# EAGLE board l3lfinal_v2 (EAGLE 6.5.0)
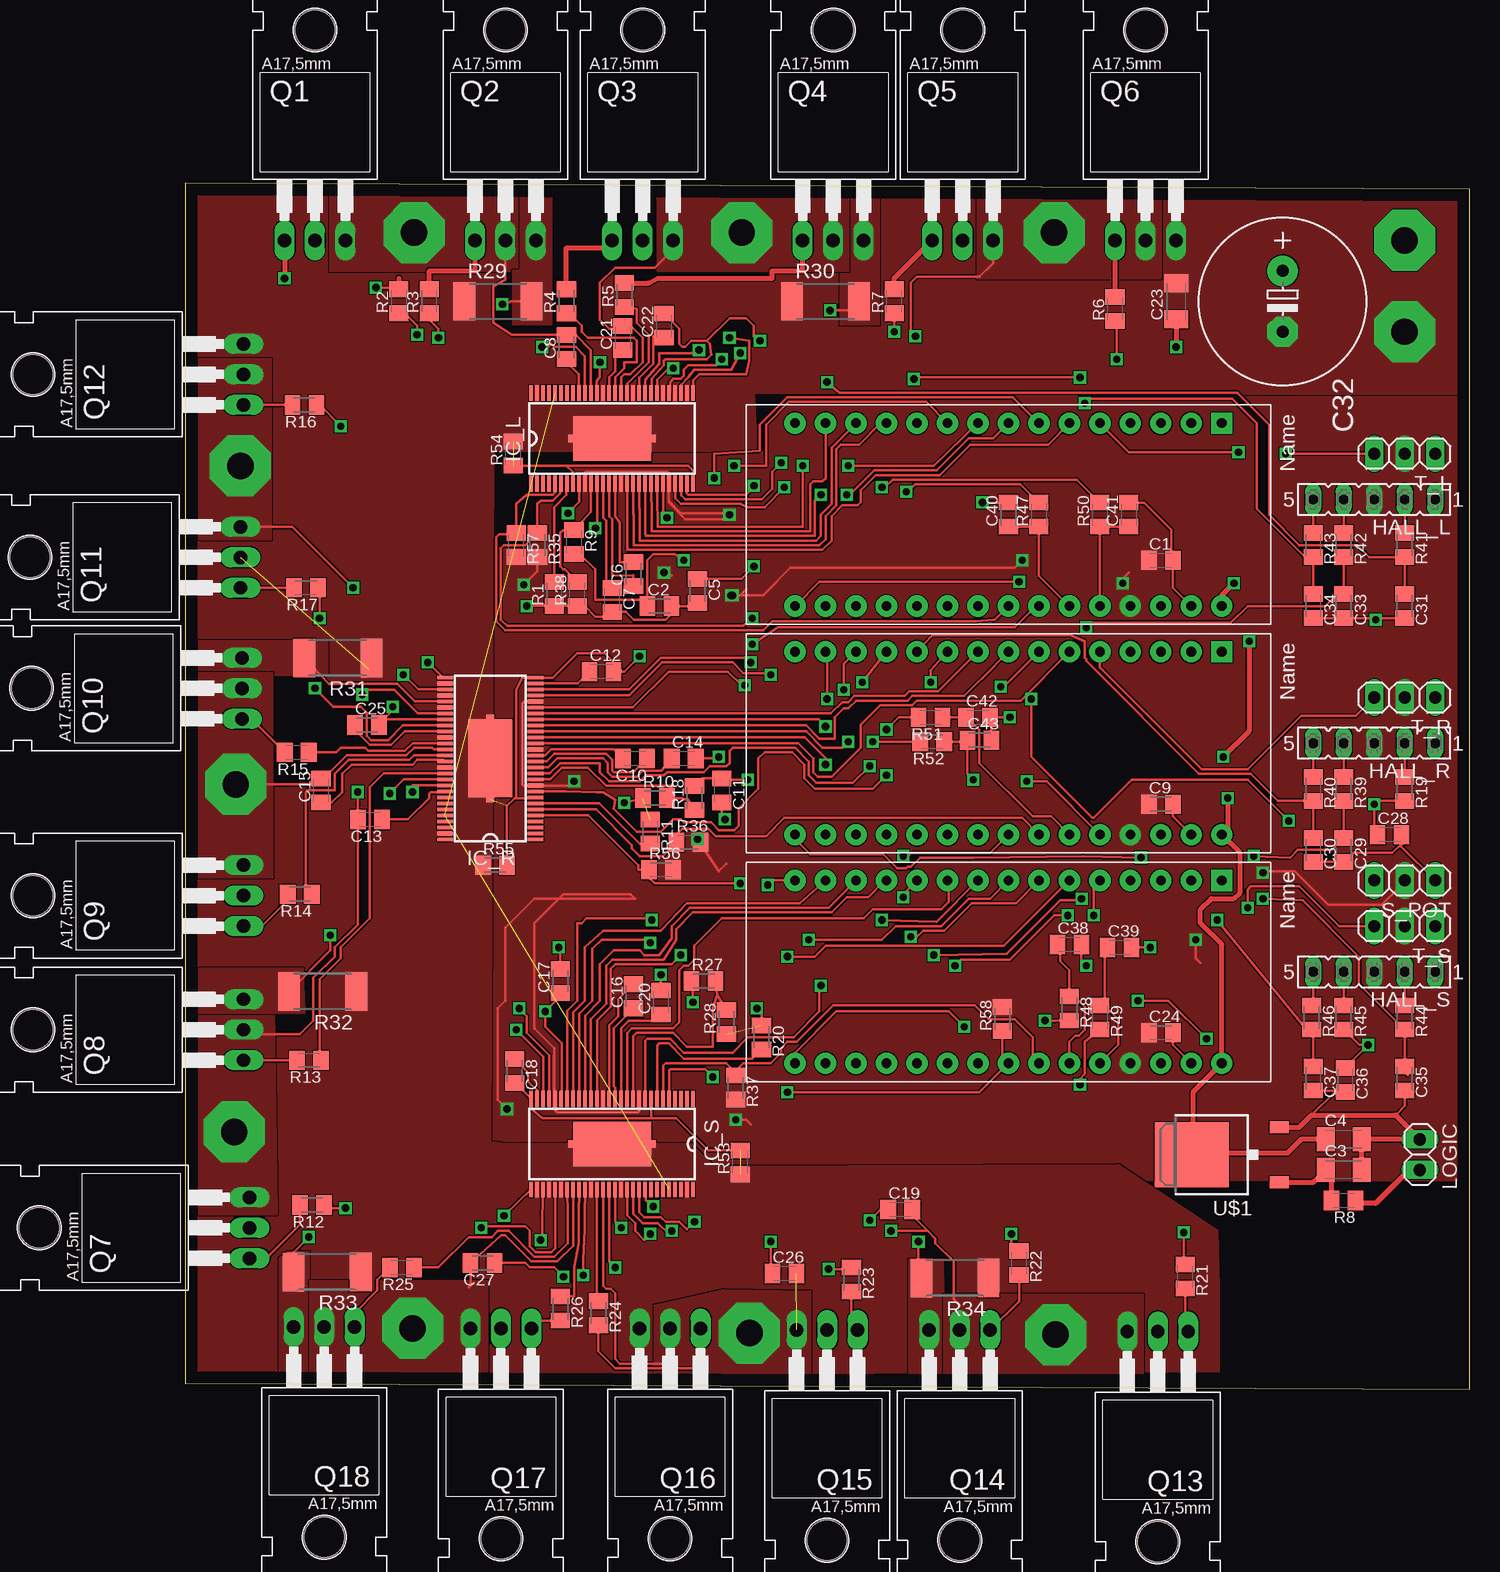
[diagram p0: board, top side]
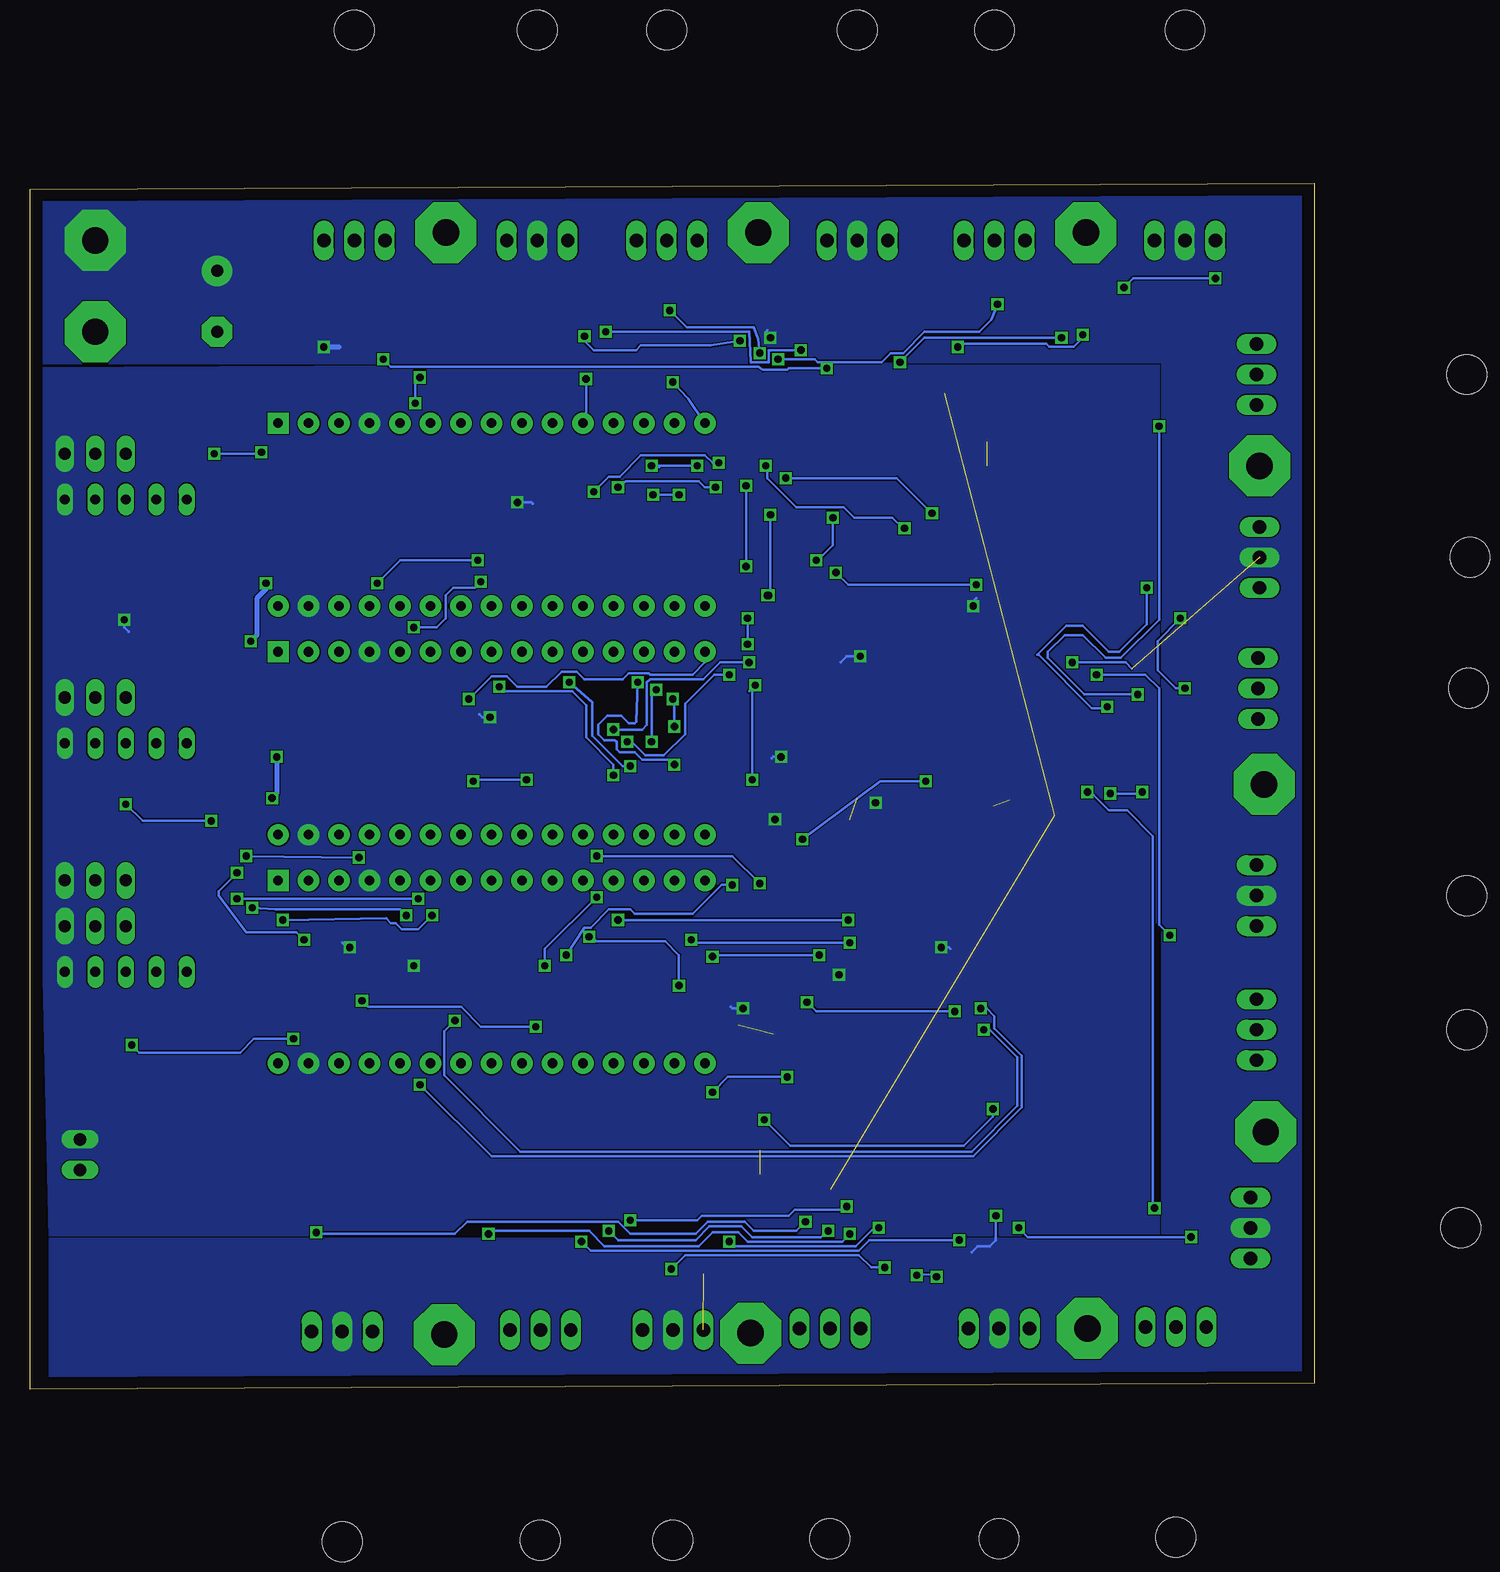
[diagram p1: board, bottom side, seen from below]

Size 107.04 x 100.51 mm. Coordinates in mm from the lower left corner, seen from the top.
Outline: 0,0.51 107.04,0 107.04,100 0,100.51 0,0.51
Copper layers (1*16): Top 0.035mm / dielectric 1.5mm / Bottom 0.035mm
Design rules "default *": minimum track width 10mil, minimum drill 24mil, track to track 4mil, track to pad 4mil, pad to pad 4mil, via to via 4mil, smd to smd 4mil, copper to edge 40mil, drill to drill 8mil, minimum pad ring 10mil, minimum via ring 8mil, stop-mask expansion 4mil, vias tented up to drill 0mil, thermal gap 10mil

## Footprints (pad centres in the part's own frame; a part is rotated, then mirrored left to right if it is on the bottom)
C0805K = smd 1.3 x 1.6: 1 -1,0; 2 1,0
C1206K = smd 1.5 x 2: 1 -1.5,0; 2 1.5,0
E5-13 = drill 1.016 pad 2.54: + -2.54,0 | drill 1.016 pad 2.54 octagon: - 2.54,0
12AWG_PAD = drill 2.2 pad 5.08 octagon: P$1 0,0
FE05-1 = drill 0.813 long: 1 -5.08,0; 2 -2.54,0; 3 0,0; 4 2.54,0; 5 5.08,0
TSSOP-56_3 = smd 1.3 x 0.3: 1 -3.775,6.75; 2 -3.775,6.25; 3 -3.775,5.75; 4 -3.775,5.25; 5 -3.775,4.75; 6 -3.775,4.25; 7 -3.775,3.75; 8 -3.775,3.25; 9 -3.775,2.75; 10 -3.775,2.25; 11 -3.775,1.75; 12 -3.775,1.25; 13 -3.775,0.75; 14 -3.775,0.25; 15 -3.775,-0.25; 16 -3.775,-0.75; 17 -3.775,-1.25; 18 -3.775,-1.75; 19 -3.775,-2.25; 20 -3.775,-2.75; 21 -3.775,-3.25; 22 -3.775,-3.75; 23 -3.775,-4.25; 24 -3.775,-4.75; 25 -3.775,-5.25; 26 -3.775,-5.75; 27 -3.775,-6.25; 28 -3.775,-6.75; 29 3.775,-6.75; 30 3.775,-6.25; 31 3.775,-5.75; 32 3.775,-5.25; 33 3.775,-4.75; 34 3.775,-4.25; 35 3.775,-3.75; 36 3.775,-3.25; 37 3.775,-2.75; 38 3.775,-2.25; 39 3.775,-1.75; 40 3.775,-1.25; 41 3.775,-0.75; 42 3.775,-0.25; 43 3.775,0.25; 44 3.775,0.75; 45 3.775,1.25; 46 3.775,1.75; 47 3.775,2.25; 48 3.775,2.75; 49 3.775,3.25; 50 3.775,3.75; 51 3.775,4.25; 52 3.775,4.75; 53 3.775,5.25; 54 3.775,5.75; 55 3.775,6.25; 56 3.775,6.75 | smd 3.7 x 6.5: 57 0,0 | smd 0.65 x 0.4: 58 0,3.45; 59 0,-3.45
1X02 = drill 1.016 long: 1 -1.27,0; 2 1.27,0
PDIP-32 = drill 0.8 pad 1.778: 3V3 15.24,-35.56; +5V 15.24,-10.16; A0 15.24,-12.7; A1 15.24,-15.24; A2 15.24,-17.78; A3 15.24,-20.32; A4 15.24,-22.86; A5 15.24,-25.4; A6 15.24,-27.94; A7 15.24,-30.48; AREF 15.24,-33.02; D0/RX 0,-5.08; D2 0,-12.7; D3 0,-15.24; D4 0,-17.78; D5 0,-20.32; D6 0,-22.86; D7 0,-25.4; D8 0,-27.94; D9 0,-30.48; D10 0,-33.02; D11 0,-35.56; D12 0,-38.1; D13 15.24,-38.1; GND 0,-10.16; GND1 15.24,-5.08; RESET 0,-7.62; RESET1 15.24,-7.62; VIN 15.24,-2.54 | drill 0.8 pad 1.778 square: D1/TX 0,-2.54
TO220 = drill 1.118 long: 1 -2.54,-6.35; 2 0,-6.35; 3 2.54,-6.35 | hole 3.302: 0,11.176
R2512 = smd 1.8 x 3.2: 1 -2.8,0; 2 2.8,0
1X03 = drill 1.016 long: 1 -2.54,0; 2 0,0; 3 2.54,0
TO252 = smd 1 x 1.6: 1 -2.28,-4.8; 2 2.28,-4.8 | smd 5.4 x 6.2: 3 0,2.5

## Placement (x,y rotation side)
C1  .1uF  [C0805K]  81.28,69.09 0 top
C2  2.2u  [C0805K]  39.5,65.28 0 top
C3  22uF  [C1206K]  96.52,18.29 0 top
C4  1uF 50V  [C1206K]  96.52,20.83 0 top
C5  1u  [C0805K]  42.67,66.55 270 top
C6  22n  [C0805K]  37.34,67.94 90 top
C7  2.2u  [C0805K]  35.56,65.79 270 top
C8  1u  [C0805K]  31.75,86.87 90 top
C9  .1uF  [C0805K]  81.28,48.77 0 top
C10  22n  [C0805K]  37.47,52.58 180 top
C11  2.2u  [C0805K]  44.7,49.91 270 top
C12  1u  [C0805K]  34.67,59.82 0 top
C13  1u  [C0805K]  15.37,47.5 180 top
C14  2.2u  [C0805K]  41.53,52.58 0 top
C15  1u  [C0805K]  11.3,49.91 90 top
C16  22n  [C0805K]  37.34,32.77 90 top
C17  2.2u  [C0805K]  31.24,34.04 90 top
C18  1u  [C0805K]  27.43,26.54 270 top
C19  1u  [C0805K]  59.56,14.99 0 top
C20  2.2u  [C0805K]  39.62,32.26 90 top
C21  1u  [C0805K]  36.45,87.63 90 top
C22  1u  [C0805K]  39.88,88.65 90 top
C23  22uF  [C1206K]  82.55,90.68 90 top
C24  .1uF  [C0805K]  81.28,29.72 0 top
C25  1u  [C0805K]  15.11,55.37 0 top
C26  1u  [C0805K]  49.91,9.65 0 top
C27  1u  [C0805K]  24.77,10.54 180 top
C28  [C0805K]  100.33,46.23 0 top
C29  [C0805K]  96.52,44.96 270 top
C30  [C0805K]  93.98,44.96 270 top
C31  [C0805K]  101.6,65.28 270 top
C32  1000u  [E5-13]  91.44,90.68 270 top
C33  [C0805K]  96.52,65.28 270 top
C34  [C0805K]  93.98,65.28 270 top
C35  [C0805K]  101.6,25.91 270 top
C36  [C0805K]  96.65,25.78 270 top
C37  [C0805K]  93.98,25.91 270 top
C38  1u  [C0805K]  73.66,37.08 0 top
C39  1u  [C0805K]  77.85,36.83 0 top
C40  1u  [C0805K]  68.58,72.9 90 top
C41  1u  [C0805K]  78.61,72.9 90 top
C42  1u  [C0805K]  66.04,56.01 0 top
C43  1u  [C0805K]  66.17,54.1 0 top
GND  12AWG_PAD  [12AWG_PAD]  101.6,88.14 0 top
HALL_L  [FE05-1]  99.06,74.17 180 top
HALL_R  [FE05-1]  99.06,53.85 180 top
HALL_S  [FE05-1]  99.06,34.8 180 top
IC_L  DRV8302  [TSSOP-56_3]  35.56,79.25 90 top
IC_R  DRV8302  [TSSOP-56_3]  25.4,52.58 180 top
IC_S  DRV8302  [TSSOP-56_3]  35.56,20.45 270 top
LOGIC  [1X02]  102.87,19.56 270 top
NANO_L  ARDUINONANO  [PDIP-32]  88.9,80.52 270 top
NANO_R  ARDUINONANO  [PDIP-32]  88.9,61.47 270 top
NANO_S  ARDUINONANO  [PDIP-32]  88.9,42.42 270 top
PHASE_AL  12AWG_PAD  [12AWG_PAD]  19.05,96.39 0 top
PHASE_AR  12AWG_PAD  [12AWG_PAD]  4.06,21.46 0 top
PHASE_AS  12AWG_PAD  [12AWG_PAD]  72.52,4.57 0 top
PHASE_BL  12AWG_PAD  [12AWG_PAD]  46.35,96.39 0 top
PHASE_BR  12AWG_PAD  [12AWG_PAD]  4.19,50.42 0 top
PHASE_BS  12AWG_PAD  [12AWG_PAD]  46.99,4.7 0 top
PHASE_CL  12AWG_PAD  [12AWG_PAD]  72.39,96.39 0 top
PHASE_CR  12AWG_PAD  [12AWG_PAD]  4.57,76.96 0 top
PHASE_CS  12AWG_PAD  [12AWG_PAD]  18.92,5.08 0 top
Q1  PSMN7R0-100PS  [TO220]  10.79,102.11 0 top
Q2  PSMN7R0-100PS  [TO220]  26.67,102.11 0 top
Q3  PSMN7R0-100PS  [TO220]  38.1,102.11 0 top
Q4  PSMN7R0-100PS  [TO220]  53.98,102.11 0 top
Q5  PSMN7R0-100PS  [TO220]  64.77,102.11 0 top
Q6  PSMN7R0-100PS  [TO220]  80.01,102.11 0 top
Q7  PSMN7R0-100PS  [TO220]  -1.02,13.46 90 top
Q8  PSMN7R0-100PS  [TO220]  -1.52,29.97 90 top
Q9  PSMN7R0-100PS  [TO220]  -1.52,41.15 90 top
Q10  PSMN7R0-100PS  [TO220]  -1.65,58.42 90 top
Q11  PSMN7R0-100PS  [TO220]  -1.78,69.34 90 top
Q12  PSMN7R0-100PS  [TO220]  -1.52,84.58 90 top
Q13  PSMN7R0-100PS  [TO220]  81.03,-1.52 180 top
Q14  PSMN7R0-100PS  [TO220]  64.52,-1.4 180 top
Q15  PSMN7R0-100PS  [TO220]  53.47,-1.4 180 top
Q16  PSMN7R0-100PS  [TO220]  40.39,-1.27 180 top
Q17  PSMN7R0-100PS  [TO220]  26.29,-1.27 180 top
Q18  PSMN7R0-100PS  [TO220]  11.56,-1.14 180 top
R1  0  [C0805K]  30.73,66.29 90 top
R2  10  [C0805K]  17.78,90.68 90 top
R3  10  [C0805K]  20.32,90.68 90 top
R4  10  [C0805K]  31.75,90.68 90 top
R5  10  [C0805K]  36.58,91.19 90 top
R6  10  [C0805K]  77.47,90.04 90 top
R7  10  [C0805K]  59.05,90.68 90 top
R8  0  [C0805K]  96.52,15.75 180 top
R9  5k  [C0805K]  32.38,70.61 270 top
R10  10k  [C0805K]  39.12,49.28 0 top
R11  0  [C0805K]  38.73,46.48 270 top
R12  10  [C0805K]  10.54,15.37 180 top
R13  10  [C0805K]  10.29,27.43 180 top
R14  10  [C0805K]  9.53,41.28 180 top
R15  10  [C0805K]  9.27,53.09 180 top
R16  10  [C0805K]  9.91,82.04 180 top
R17  10  [C0805K]  10.03,66.8 180 top
R18  5k  [C0805K]  42.42,49.28 90 top
R19  [C0805K]  101.6,50.04 270 top
R20  0  [C0805K]  48.01,29.34 270 top
R21  10  [C0805K]  83.31,9.4 270 top
R22  10  [C0805K]  69.47,10.54 270 top
R23  10  [C0805K]  55.5,9.14 270 top
R24  10  [C0805K]  34.42,6.35 270 top
R25  10  [C0805K]  18.03,10.16 180 top
R26  10  [C0805K]  31.24,6.73 270 top
R27  5k  [C0805K]  43.18,34.04 0 top
R28  10k  [C0805K]  45.09,30.61 90 top
R29  1m  [R2512]  26.04,90.68 0 top
R30  1m  [R2512]  53.34,90.68 0 top
R31  1m  [R2512]  12.7,60.96 180 top
R32  1m  [R2512]  11.43,33.15 180 top
R33  1m  [R2512]  11.81,9.78 180 top
R34  1m  [R2512]  64.14,9.27 180 top
R35  10k  [C0805K]  29.34,70.36 270 top
R36  10k  [C0805K]  41.91,45.59 0 top
R37  10k  [C0805K]  45.85,25.15 270 top
R38  10k  [C0805K]  32.64,66.29 90 top
R39  0  [C0805K]  96.52,50.04 270 top
R40  0  [C0805K]  93.98,50.04 270 top
R41  0  [C0805K]  101.6,70.36 270 top
R42  0  [C0805K]  96.52,70.36 270 top
R43  0  [C0805K]  93.98,70.36 270 top
R44  0  [C0805K]  101.6,30.99 270 top
R45  0  [C0805K]  96.52,30.99 270 top
R46  0  [C0805K]  93.85,30.99 270 top
R47  0  [C0805K]  71.12,72.9 90 top
R48  0  [C0805K]  73.66,31.75 270 top
R49  0  [C0805K]  76.2,30.99 270 top
R50  0  [C0805K]  76.2,72.9 90 top
R51  0  [C0805K]  62.1,56.01 180 top
R52  0  [C0805K]  62.23,53.98 180 top
R53  0  [C0805K]  46.23,18.92 90 top
R54  0  [C0805K]  27.3,77.98 90 top
R55  0  [C0805K]  25.78,43.69 0 top
R56  10k  [C0805K]  39.62,43.31 0 top
R57  10k  [C0805K]  27.56,70.36 270 top
R58  10k  [C0805K]  68.07,30.86 90 top
S_POT  [1X03]  101.6,42.42 180 top
T_L  [1X03]  101.6,77.98 180 top
T_R  [1X03]  101.6,57.66 180 top
T_S  [1X03]  101.6,38.61 180 top
U$1  7809  [TO252]  86.36,19.56 90 top
VDD  12AWG_PAD  [12AWG_PAD]  101.6,95.76 0 top

## Library data of the parts
C1-C43 R2-R7 R12-R17 R21-R26 R29-R34 = rcl
GND PHASE_AL PHASE_AR PHASE_AS PHASE_BL PHASE_BR PHASE_BS PHASE_CL PHASE_CR PHASE_CS VDD = tutorial
HALL_L HALL_R HALL_S = con-lsta; OC_FARNELL: unknown; OC_NEWARK: unknown
IC_L IC_R IC_S = RoboJackets-PowerICs
LOGIC S_POT T_L T_R T_S = pinhead
NANO_L NANO_R NANO_S = jet-lib
Q1-Q18 U$1 = l3l_final
R1 R8-R11 R18-R20 R27 R28 R35-R58 = resistor

## Nets
+12V: LOGIC.2 R8.1
BST_BK: IC_L.52 IC_R.52 IC_S.52
DC_CAL_L: IC_L.12 NANO_L.D7
DC_CAL_R: IC_R.12 NANO_R.D7
DC_CAL_S: IC_S.12 NANO_S.D7
DVDDL: C2.1 IC_L.23 R9.2
DVDDR: C11.1 IC_R.23 R18.2
DVDDS: C17.1 IC_S.23 R27.1
FAULT_L: IC_L.6 NANO_L.A2 R35.1
FAULT_R: IC_R.6 NANO_R.A2 R36.1
FAULT_S: IC_S.6 NANO_S.A2 R37.1
GND: C1.2 C2.2 C3.2 C4.2 C5.2 C7.2 C9.2 C11.2 C12.2 C14.2 C17.2 C18.2 C20.2 C23.2 C24.2 C28.2 C29.2 C30.2 C31.2 C32.- C33.2 C34.2 C35.2 C36.2 C37.2 C38.2 C39.2 C40.2 C41.2 C42.2 C43.2 GND.P$1 HALL_L.1 HALL_R.1 HALL_S.1 IC_L.8 IC_L.28 IC_L.30 IC_L.32 IC_L.34 IC_L.39 IC_L.44 IC_L.55 IC_L.57 IC_L.58 IC_L.59 IC_R.8 IC_R.28 IC_R.30 IC_R.32 IC_R.34 IC_R.39 IC_R.44 IC_R.55 IC_R.57 IC_R.58 IC_R.59 IC_S.8 IC_S.28 IC_S.30 IC_S.32 IC_S.34 IC_S.39 IC_S.44 IC_S.55 IC_S.57 IC_S.58 IC_S.59 LOGIC.1 NANO_L.GND NANO_L.GND1 NANO_R.GND NANO_R.GND1 NANO_S.GND NANO_S.GND1 Q6.3 Q12.3 Q16.3 R1.1 R10.1 R11.1 R20.1 R28.1 R29.1 R30.1 R31.1 R32.1 R33.1 R34.1 R38.1 R53.1 R53.2 R54.1 R54.2 R55.1 R55.2 S_POT.1 T_L.1 T_R.1 T_S.1 U$1.2
HAL: IC_L.17 NANO_L.D3
HALL_AL: C31.1 NANO_L.D12 R41.2
HALL_AR: C28.1 NANO_R.D12 R19.2
HALL_AS: C35.1 NANO_S.D12 R44.2
HALL_BL: C33.1 NANO_L.D13 R42.2
HALL_BR: C29.1 NANO_R.D13 R39.2
HALL_BS: C36.1 NANO_S.D13 R45.2
HALL_CL: C34.1 NANO_L.D8 R43.2
HALL_CR: C30.1 NANO_R.D8 R40.2
HALL_CS: C37.1 NANO_S.D8 R46.2
HAR: IC_R.17 NANO_R.D3
HAS: IC_S.17 NANO_S.D3
HBL: IC_L.19 NANO_L.D10
HBR: IC_R.19 NANO_R.D10
HBS: IC_S.19 NANO_S.D10
HCL: IC_L.21 NANO_L.D11
HCR: IC_R.21 NANO_R.D11
HCS: IC_S.21 NANO_S.D11
LAL: IC_L.18 NANO_L.D9
LAR: IC_R.18 NANO_R.D9
LAS: IC_S.18 NANO_S.D9
LBL: IC_L.20 NANO_L.D5
LBR: IC_R.20 NANO_R.D5
LBS: IC_S.20 NANO_S.D5
LCL: IC_L.22 NANO_L.D6
LCR: IC_R.22 NANO_R.D6
LCS: IC_S.22 NANO_S.D6
M_OC_L: IC_L.9 NANO_L.D4
M_OC_R: IC_R.9 NANO_R.D4
M_OC_S: IC_S.9 NANO_S.D4
N$1: IC_L.47 R2.1
N$2: IC_L.42 R4.1
N$3: IC_L.37 R7.1
N$4: IC_L.45 R3.1
N$5: C13.1 IC_R.48
N$6: C3.1 R8.2 U$1.1
N$7: IC_L.40 R5.1
N$8: IC_L.35 R6.1
N$9: C15.1 IC_R.43
N$16: IC_L.7 R1.2
N$17: Q5.1 R7.2
N$18: Q6.1 R6.2
N$19: Q4.1 R5.2
N$20: Q3.1 R4.2
N$21: Q2.1 R3.2
N$22: Q1.1 R2.2
N$23: IC_R.47 R12.1
N$24: C5.1 IC_L.27
N$27: C6.1 IC_L.14
N$28: C6.2 IC_L.15
N$29: C8.1 IC_L.48
N$30: C7.1 IC_L.13
N$31: IC_L.11 R9.1 R38.2
N$32: IC_R.42 R14.1
N$33: IC_R.37 R17.1
N$34: IC_R.45 R13.1
N$35: IC_R.40 R15.1
N$36: IC_R.35 R16.1
N$43: IC_R.7 R11.2
N$44: Q11.1 R17.2
N$45: Q12.1 R16.2
N$46: Q10.1 R15.2
N$47: Q9.1 R14.2
N$48: Q8.1 R13.2
N$49: Q7.1 R12.2
N$50: C12.1 IC_R.27
N$53: C10.1 IC_R.14
N$54: C10.2 IC_R.15
N$55: C25.1 IC_R.38
N$56: C14.1 IC_R.13
N$57: IC_R.11 R10.2 R18.1
N$58: C19.1 IC_S.48
N$59: IC_S.47 R21.1
N$60: IC_S.42 R23.1
N$61: IC_S.37 R26.1
N$62: IC_S.45 R22.1
N$63: IC_S.40 R24.1
N$64: IC_S.35 R25.1
N$67: HALL_L.2 R41.1
N$71: IC_S.7 R20.2
N$72: Q17.1 R26.2
N$73: Q18.1 R25.2
N$74: Q16.1 R24.2
N$75: Q15.1 R23.2
N$76: Q14.1 R22.2
N$77: Q13.1 R21.2
N$78: C18.1 IC_S.27
N$81: C16.1 IC_S.14
N$82: C16.2 IC_S.15
N$83: C26.1 IC_S.43
N$84: C20.1 IC_S.13
N$86: C27.1 IC_S.38
N$88: C21.1 IC_L.43
N$89: C22.1 IC_L.38
N$91: IC_S.11 R27.2 R28.2
N$96: HALL_L.4 R42.1
N$97: HALL_L.5 R43.1
N$98: HALL_R.2 R19.1
N$99: HALL_R.4 R39.1
N$100: HALL_R.5 R40.1
N$101: HALL_S.2 R44.1
N$102: HALL_S.4 R45.1
N$103: HALL_S.5 R46.1
N$106: IC_S.26 R48.2
N$107: IC_S.25 R49.2
N$110: IC_L.26 R47.2
N$111: IC_L.25 R50.2
N$112: IC_R.26 R51.2
N$113: IC_R.25 R52.2
OCTW_L: IC_L.5 NANO_L.A3 R57.1
OCTW_R: IC_R.5 NANO_R.A3 R56.1
OCTW_S: IC_S.5 NANO_S.A3 R58.1
PHASE_AL: C8.2 IC_L.46 PHASE_AL.P$1 Q1.3 Q2.2
PHASE_AR: C13.2 IC_R.46 PHASE_AR.P$1 Q7.3 Q8.2
PHASE_AS: C19.2 IC_S.46 PHASE_AS.P$1 Q13.3 Q14.2
PHASE_BL: C21.2 IC_L.41 PHASE_BL.P$1 Q3.3 Q4.2
PHASE_BR: C15.2 IC_R.41 PHASE_BR.P$1 Q9.3 Q10.2
PHASE_BS: C26.2 IC_S.41 PHASE_BS.P$1 Q15.3 Q16.2
PHASE_CL: C22.2 IC_L.36 PHASE_CL.P$1 Q5.3 Q6.2
PHASE_CR: C25.2 IC_R.36 PHASE_CR.P$1 Q11.3 Q12.2
PHASE_CS: C27.2 IC_S.36 PHASE_CS.P$1 Q17.3 Q18.2
S_POT: S_POT.3
SN1L: IC_L.33 Q2.3 R29.2
SN1R: IC_R.33 Q10.3 R31.2
SN1S: IC_S.33 Q18.3 R33.2
SN2L: IC_L.31 Q4.3 R30.2
SN2R: IC_R.31 Q8.3 R32.2
SN2S: IC_S.31 Q14.3 R34.2
SO1L: C41.1 NANO_L.A0 R50.1
SO1R: C43.1 NANO_R.A0 R52.1
SO1S: C39.1 NANO_S.A0 R49.1
SO2L: C40.1 NANO_L.A1 R47.1
SO2R: C42.1 NANO_R.A1 R51.1
SO2S: C38.1 NANO_S.A1 R48.1
T_L: NANO_L.D2 T_L.3
T_R: NANO_R.D2 T_R.3
T_S: NANO_S.D2 T_S.3
VCC: C1.1 C9.1 C24.1 HALL_L.3 HALL_R.3 HALL_S.3 IC_L.10 IC_L.16 IC_L.24 IC_R.10 IC_R.16 IC_R.24 IC_S.10 IC_S.16 IC_S.24 NANO_L.+5V NANO_R.+5V NANO_S.+5V R35.2 R36.2 R37.2 R56.2 R57.2 R58.2 S_POT.2 T_L.2 T_R.2 T_S.2
VDD: C23.1 C32.+ IC_L.29 IC_R.29 IC_S.29 Q1.2 Q3.2 Q5.2 Q7.2 Q9.2 Q11.2 Q13.2 Q15.2 Q17.2 VDD.P$1
VEE: C4.1 NANO_L.VIN NANO_R.VIN NANO_S.VIN U$1.3

## Tracks (layer width: path | path; a pad name or v marks a point on that pad's centre or on a via)
+12V
  Top 0.406: LOGIC.2 101.98,18.29 99.19,15.49 97.77,15.49 R8.1
BST_BK  (2 unrouted)
DC_CAL_L  (via drill 0.6)
  Top 0.203: IC_L.12 34.31,71.9 v34.16,71.75 | v45.72,76.96 48.39,76.96 48.39,80.39 50.29,82.3 61.72,82.3 NANO_L.D7
  Bottom 0.203: v34.16,71.75 34.29,71.75 35.18,72.64 38.35,72.64 39.24,73.53 43.18,73.53 45.59,75.95 45.59,76.83 v45.72,76.96
DC_CAL_R  (via drill 0.6)
  Top 0.203: IC_R.12 30.37,51.33 31.24,52.2 34.54,52.2 34.54,51.44 35.31,50.67 37.85,50.67 38.35,51.18 39.88,51.18 40.13,51.44 43.18,51.44 43.69,51.94 45.09,51.94 45.34,52.2 45.34,53.21 45.59,53.47 50.8,53.47 51.94,52.32 51.94,51.18 52.58,50.55 55.63,50.55 v57.02,51.94 | v62.1,58.93 62.1,59.94 NANO_R.D7
  Bottom 0.203: v57.02,51.94 57.66,51.94 60.2,54.48 60.2,57.28 v62.1,58.93
DC_CAL_S
  Top 0.203: IC_S.12 36.81,29.7 37.21,30.1 40.64,30.1 41.15,30.61 41.15,34.93 41.53,35.31 41.91,35.31 42.42,35.81 42.42,36.96 44.7,39.24 56.52,39.24 57.28,40.01 62.99,40.01 63.63,40.64 63.63,42.29 NANO_S.D7
DVDDL  (via drill 0.6)
  Top 0.203: R9.2 32.88,69.61 34.16,68.33 34.16,65.79 37.99,65.79 C2.1 38.48,65.29 38.48,69.09 38.99,69.6 40.77,69.6 v41.53,69.09 | IC_L.23 39.81,72.71 v40.13,72.64
  Bottom 0.203: v40.13,72.64 40.13,70.34 41.09,69.38 41.24,69.38 v41.53,69.09
DVDDR  (via drill 0.6)
  Top 0.203: IC_R.23 37.27,56.83 40.26,59.82 45.21,59.82 46.35,58.67 v46.61,58.67 | v46.86,50.8 45.07,50.8 C11.1 43.05,50.91 R18.2
  Bottom 0.203: 47.12,58.17 v46.61,58.67 46.86,58.42 v46.86,50.8
DVDDS  (via drill 0.6)
  Top 0.203: C17.1 31.24,32.77 v29.97,31.5 29.97,30.23 31.37,28.83 31.37,24.28 IC_S.23 | v42.29,32.26 42.29,33.93 R27.1
  Bottom 0.203: v29.97,31.5 41.53,31.5 v42.29,32.26
FAULT_L  (via drill 0.6)
  Top 0.203: IC_L.6 31.24,75.41 31.24,74.68 30.61,74.04 29.59,74.04 29.34,73.79 R35.1 28.34,70.36 26.54,70.36 26.29,70.1 26.29,64.14 26.8,63.63 46.48,63.63 v47.24,64.26 | NANO_L.A2 70.87,65.28 69.09,63.5 67.69,63.5 49.4,63.5 v47.24,62.1
  Bottom 0.203: v47.24,62.1 v47.24,64.26
FAULT_R
  Top 0.203: IC_R.6 34.22,48.33 37.21,45.34 37.21,45.09 37.85,44.45 39.77,44.45 R36.1 40.91,46.24 41.4,46.74 43.56,46.74 44.2,46.1 48.39,46.1 49.91,47.62 69.72,47.62 NANO_R.A2
FAULT_S
  Top 0.203: IC_S.6 39.81,26.98 40.01,27.18 45.09,27.18 45.85,26.42 45.97,26.27 R37.1 45.99,26.69 46.48,27.18 48.77,27.18 49.66,28.07 49.66,28.45 50.16,28.96 50.93,28.96 53.98,32 65.79,32 66.93,30.86 69.09,30.86 70.61,29.34 70.61,27.69 NANO_S.A2
GND  (via drill 0.6)  (5 unrouted)
  Top 0.203: 31.75,76.96 32.26,76.45 32.26,75.52 IC_L.8 | IC_L.28 42.31,76.56 41.91,76.96 31.75,76.96 | R54.1 31.73,76.98 31.75,76.96 | v28.45,65.28 28.46,65.29 R1.1 R38.1 33.26,65.29 34.16,64.39 35.16,64.39 C7.2 36.69,64.79 37.34,64.14 40.01,64.14 40.39,64.52 40.39,65.17 C2.2 42.4,65.28 C5.2 | NANO_L.GND1 82.28,66.82 C1.2 82.17,69.2 82.17,71.63 79.9,73.9 C41.2 | C40.2 66.44,73.9 v66.42,73.91 | C31.2 99.33,64.28 v99.19,64.14 99.04,64.28 C33.2 C34.2 | R55.2 26.78,48.62 27.43,49.28 | 27.43,49.28 27.56,49.28 | 27.56,49.28 29.12,49.28 IC_R.8 | IC_R.28 28.59,59.33 28.07,59.31 | 27.56,49.4 27.56,49.28 | C12.2 36.45,59.82 | 36.45,59.82 36.58,59.82 v37.85,61.09 | C14.2 44.32,52.58 v44.45,52.71 | C11.2 44.7,47.75 v44.96,47.5 | R10.1 v36.58,48.9 | C9.2 82.28,47.77 NANO_R.GND1 | C43.2 67.17,55.88 C42.2 v68.71,56.01 | R53.2 43.58,19.92 40.89,22.61 38.99,22.61 | 38.99,22.61 29.72,22.61 28.83,23.37 28.83,24.2 IC_S.28 27.49,25.54 C18.2 | IC_S.8 38.81,22.66 38.99,22.61 | 27.43,49.28 27.56,49.4 | 27.56,49.4 27.56,58.29 28.07,59.31 | 28.07,59.31 30.61,59.31 32.64,61.34 34.92,61.34 36.45,59.82 | C20.2 v39.62,34.54 | C17.2 31.24,36.7 v31.11,36.83 | R20.1 48.01,31.37 v47.62,31.75 | C30.2 C29.2 97.27,44.7 100.58,44.7 101.33,45.45 C28.2 101.33,45.23 S_POT.1 | C35.2 101.6,23.62 100.84,22.86 | C39.2 v80.39,36.83 | C37.2 96.52,24.91 C36.2 95.77,24.78 93.79,22.8 | C24.2 82.28,28.72 NANO_S.GND1 | C38.2 74.66,35.7 v75.06,35.31
  Top 0.406: C3.2 C4.2 LOGIC.1 100.84,22.86 93.85,22.86 93.79,22.8 92.83,21.84 U$1.2
  Bottom 0.203: v28.45,65.28 28.45,65.66 28.19,65.91 | v66.42,73.91 65.28,73.91 65.15,73.79 | v99.19,64.14 99.19,63.5 98.81,63.12 | v37.85,61.09 38.99,61.09 39.5,60.58 | v44.45,52.71 45.09,52.71 45.21,52.58 | v44.96,47.5 44.96,47.37 45.21,47.12 | v36.58,48.9 36.32,48.9 36.45,49.15 | v68.71,56.01 69.34,56.01 69.6,56.26 | v39.62,34.54 39.75,34.42 | v31.11,36.83 30.48,36.83 30.35,36.7 | v47.62,31.75 48.51,31.75 48.64,31.88 | v80.39,36.83 80.64,36.83 81.03,37.21 | v75.06,35.31 75.44,34.93
  pour Bottom (rank 2, no thermals): 12.06,85.6 107.06,85.09 105.41,12.57 12.06,12.57
  pour Top (rank 3, no thermals): 0,100.2 106.68,100.08 106.68,82.93 47.37,83.06 47.62,78.23 25.65,78.23 25.4,20.57 26.04,20.57 26.54,20.45 42.16,20.45 44.07,18.54 77.72,18.67 85.98,13.21 86.11,8.51 86.11,1.52 0,1.14
HAL
  Top 0.203: IC_L.17 36.81,70.12 36.96,69.98 | 36.83,69.98 36.96,69.98 | 36.96,69.98 53.09,69.98 53.85,70.74 53.85,72.77 54.74,73.66 56.01,73.66 56.26,73.91 56.26,74.93 57.53,76.2 62.87,76.2 65.41,78.74 71.88,78.74 NANO_L.D3
HALL_AL  (via drill 0.6)
  Top 0.203: C31.1 R41.2 98.66,69.36 97.66,70.36 92.84,70.36 90.3,72.9 90.3,80.39 87.63,83.06 54.48,83.06 v53.47,83.95
  Bottom 0.203: v53.47,83.95 52.2,82.55 NANO_L.D12
HALL_AR  (via drill 0.6)
  Top 0.203: v70.48,57.53 70.48,52.71 75.56,47.62 75.69,47.62 78.87,50.8 88.52,50.8 v91.95,47.37 | C28.1 99.06,46.5 v99.06,48.77 99.33,49.04 R19.2
  Bottom 0.203: NANO_R.D12 50.8,60.58 51.82,59.56 55.37,59.56 55.5,59.69 57.15,59.69 57.66,59.18 60.83,59.18 61.47,59.82 62.74,59.82 64.01,58.55 66.42,58.55 67.31,59.44 68.58,59.44 v70.48,57.53 | v91.95,47.37 97.66,47.37 v99.06,48.77
HALL_AS  (via drill 0.6)
  Top 0.203: NANO_S.D12 48.9,42.42 v48.51,42.04 | v62.36,36.2 68.45,36.32 72.9,40.77 74.55,40.77 v74.68,40.89 | v89.79,40.89 93.09,40.77 97.79,36.07 97.79,33.8 R44.2 C35.1 | C35.1 101.6,26.42 101.85,26.16 101.85,26.65 C35.1
  Bottom 0.203: v48.51,42.04 49.4,42.04 51.82,39.62 56.64,39.62 57.02,40.01 58.8,40.01 60.33,38.48 60.83,38.48 v62.36,36.2 | v74.68,40.89 v89.79,40.89
HALL_BL  (via drill 0.6)
  Top 0.203: R42.2 C33.1 96,66.28 95,65.28 88.52,65.28 87.12,63.88 75.44,63.88 v75.06,63.5 | v69.47,67.31 52.83,67.31 NANO_L.D13
  Bottom 0.203: v75.06,63.5 73.15,63.5 72.39,64.26 72.39,66.17 71.75,66.8 69.98,66.8 v69.47,67.31
HALL_BR  (via drill 0.6)
  Top 0.203: R39.2 C29.1 95.52,44.96 92.71,44.96 92.08,44.32 v89.03,44.45 | NANO_R.D13 50.8,45.85 52.07,44.58 58.17,44.58 59.31,43.43 60.07,43.43 60.2,43.56 60.45,43.56 61.21,44.32 65.66,44.32 74.8,44.45 v79.63,44.32
  Bottom 0.203: v79.63,44.32 v89.03,44.45
HALL_BS  (via drill 0.6)
  Top 0.203: NANO_S.D13 50.8,28.07 54.23,31.5 63.63,31.5 v64.9,30.23 | v79.38,32.38 81.92,32.38 v85.09,29.21 | R45.2 97.81,28.7 v98.55,28.7 96.65,26.8 C36.1
  Bottom 0.203: v64.9,30.23 69.47,30.23 71.12,31.88 78.87,31.88 v79.38,32.38 | v85.09,29.21 88.39,29.21 89.53,28.07 97.92,28.07 v98.55,28.7
HALL_CL  (via drill 0.6)
  Top 0.203: C34.1 R43.2 93.33,69.36 89.28,73.41 89.28,80.52 87.25,82.55 75.31,82.55 v74.93,82.17 | v74.55,84.33 60.83,84.33 v60.71,84.2
  Bottom 0.203: v74.93,82.17 74.93,83.95 v74.55,84.33 | v60.71,84.2 60.71,80.77 NANO_L.D8
HALL_CR
  Top 0.203: C30.1 R40.2 91.04,49.04 88.77,51.31 84.45,51.31 75.06,60.71 75.06,60.83 74.93,60.96 74.93,62.36 73.79,62.87 62.23,62.87 NANO_R.D8
HALL_CS  (via drill 0.6)
  Top 0.203: C37.1 93.98,29.86 R46.2 93.46,29.99 v85.98,39.12 | v73.53,39.5 72.39,39.5 68.71,35.81 64.64,35.81 v64.14,35.31 | v59.82,41.02 59.82,41.28 NANO_S.D8
  Bottom 0.203: v85.98,39.12 77.34,39.24 76.96,38.86 76.58,38.86 76.07,38.35 74.68,38.35 v73.53,39.5 | v64.14,35.31 64.14,36.7 v59.82,41.02
HAR
  Top 0.203: IC_R.17 51.07,53.83 52.32,52.58 52.32,51.44 52.7,51.05 53.85,51.05 56.26,53.47 56.26,55.37 57.91,57.02 60.58,57.02 60.96,57.4 69.6,57.4 NANO_R.D3
HAS  (via drill 0.6)
  Top 0.203: IC_S.17 34.31,30.75 35.43,31.88 35.43,35.05 35.81,35.43 40.51,35.43 v41.27,36.2 | v50.16,36.07 52.45,36.07 53.34,36.96 68.2,36.96 NANO_S.D3
  Bottom 0.203: v41.27,36.2 50.04,36.2 v50.16,36.07
HBL
  Top 0.203: IC_L.19 37.81,73.44 37.85,73.41 37.85,70.74 52.58,70.74 52.96,71.12 52.96,72.9 53.85,73.79 53.85,78.49 NANO_L.D10
HBR  (via drill 0.6)
  Top 0.203: IC_R.19 51.73,54.83 53.09,53.47 54.74,53.47 v55.24,53.98 | v54.86,58.29 54.86,60.45 NANO_R.D10
  Bottom 0.203: v55.24,53.98 55.24,57.91 v54.86,58.29
HBS
  Top 0.203: IC_S.19 33.31,31.15 34.54,32.38 34.54,35.43 35.69,36.58 37.85,36.58 38.23,36.2 39.5,36.2 40.51,37.59 40.51,38.61 42.04,40.13 53.59,40.13 NANO_S.D10
HCL
  Top 0.203: IC_L.21 38.81,73.97 38.86,73.91 38.86,71.5 52.07,71.5 52.07,75.44 52.32,75.69 53.09,75.69 53.34,75.95 NANO_L.D11
HCR  (via drill 0.6)
  Top 0.203: IC_R.21 52.76,55.83 v53.34,55.25 | v53.47,57.53 53.47,61.34 NANO_R.D11
  Bottom 0.203: v53.34,55.25 53.34,57.4 v53.47,57.53
HCS
  Top 0.203: IC_S.21 32.31,31.42 33.27,32.38 33.27,36.83 34.8,38.23 39.62,38.23 41.78,40.51 51.18,40.51 NANO_S.D11
LAL
  Top 0.203: IC_L.18 37.31,72.93 37.34,72.9 37.34,70.36 52.83,70.36 53.34,70.87 53.34,72.77 54.23,73.66 54.23,78.36 54.61,78.74 56.13,78.74 57.78,80.39 58.29,80.39 NANO_L.D9
LAR  (via drill 0.6)
  Top 0.203: IC_R.18 51.59,54.33 53.34,52.58 v53.34,52.07 | NANO_R.D9 v56.39,58.93
  Bottom 0.203: v56.39,58.93 56.52,55.63 56.64,55.5 57.15,55.5 57.78,56.13 58.93,56.13 59.69,55.37 59.69,54.61 59.18,54.1 58.29,54.1 58.17,53.98 58.17,53.34 57.91,53.09 56.64,53.09 56.01,52.45 53.72,52.45 v53.34,52.07
LAS
  Top 0.203: NANO_S.D9 58.29,42.42 56.9,41.02 55.12,41.02 53.85,39.75 42.29,39.75 40.89,38.35 40.89,37.47 39.88,35.81 35.56,35.81 35.05,35.31 35.05,32.13 33.78,30.86 33.78,24.25 IC_S.18
LBL  (via drill 0.6)
  Top 0.203: 38.35,71.12 38.48,71.12 | 38.48,71.12 52.45,71.12 52.45,74.04 v52.96,74.55 | IC_L.20 38.31,71.29 38.48,71.12 | v55.12,74.55 55.37,74.55 57.4,76.58 62.61,76.58 65.28,79.25 67.31,79.25 NANO_L.D5
  Bottom 0.203: v52.96,74.55 v55.12,74.55
LBR
  Top 0.203: IC_R.20 51.73,55.33 52.83,54.23 54.1,54.23 54.1,56.01 54.86,56.77 55.24,56.77 55.88,57.4 60.2,57.4 60.58,57.79 64.9,57.79 66.04,58.93 66.42,59.31 NANO_R.D5
LBS  (via drill 0.6)
  Top 0.203: IC_S.20 32.81,31.29 33.91,32.38 33.91,36.7 34.67,37.47 38.48,37.47 v38.73,37.21 | v51.94,37.47 58.04,37.47 59.18,38.61 62.99,38.61 65.28,40.89 67.06,40.89 NANO_S.D5
  Bottom 0.203: v38.73,37.21 51.69,37.21 v51.94,37.47
LCL  (via drill 0.6)
  Top 0.203: IC_L.22 39.31,74.48 39.37,71.88 51.44,71.88 v51.44,76.96 | v55.24,76.96 62.36,76.96 NANO_L.D6
  Bottom 0.203: v51.44,76.96 v55.24,76.96 54.61,76.83
LCR
  Top 0.203: IC_R.22 53.79,56.33 54.74,57.28 55.24,57.28 55.75,57.79 59.94,57.79 60.33,58.17 62.74,58.17 NANO_R.D6
LCS  (via drill 0.6)
  Top 0.203: IC_S.22 31.81,31.56 32.64,32.38 32.64,38.86 33.02,38.86 33.4,39.24 38.73,39.24 v38.86,39.12 | NANO_S.D6 62.61,38.99 v58.04,39.12
  Bottom 0.203: v38.86,39.12 v58.04,39.12
M_OC_L  (via drill 0.6)
  Top 0.203: IC_L.9 32.81,73.96 v31.88,73.02 | v44.07,75.95 44.07,77.98 47.88,78.23 47.88,80.39 50.16,82.68 68.96,82.68 NANO_L.D4
  Bottom 0.203: v44.07,75.95 34.8,75.95 v31.88,73.02
M_OC_R  (via drill 0.6)
  Top 0.203: IC_R.9 31.67,49.83 34.29,49.78 34.8,49.78 35.81,49.15 35.69,48.39 37.59,46.48 39.62,46.48 40.64,47.5 41.27,47.5 41.53,47.24 43.81,47.24 44.45,46.61 45.72,46.61 46.1,46.99 46.1,48.39 47.75,50.04 47.75,52.58 48.26,53.09 50.55,53.09 51.56,52.07 51.56,50.93 52.45,50.04 57.28,50.04 v58.42,51.18 | v67.94,58.55 68.2,58.55 NANO_R.D4
  Bottom 0.203: v58.42,51.18 58.42,52.07 60.71,54.36 60.71,57.02 61.85,58.17 67.56,58.17 v67.94,58.55
M_OC_S  (via drill 0.6)
  Top 0.203: IC_S.9 38.31,29.04 38.48,29.21 40.39,29.21 41.53,28.07 45.59,28.07 46.86,29.34 50.67,29.34 52.83,31.5 52.83,33.53 v52.96,33.66 | v60.45,37.72 60.96,37.72 61.47,38.23 63.25,38.23 65.53,40.51 69.22,40.51 NANO_S.D4
  Bottom 0.203: v52.96,33.66 52.96,36.2 54.1,37.34 59.82,37.34 v60.45,37.72
N$1  (via drill 0.6)
  Top 0.203: R2.1 18.27,89.68 19.3,88.65 v19.3,87.88 | IC_L.47 33.27,83.06 33.27,86.11 32.51,86.87 30.73,86.87 30.48,87.12 30.23,86.87 v29.72,86.87
  Bottom 0.203: v19.3,87.88 19.3,87.63 20.07,86.87 22.1,86.87 22.35,87.12 29.46,87.12 v29.72,86.87
N$2
  Top 0.203: R4.1 31.99,89.68 33.02,88.65 33.02,88.14 33.53,87.63 37.34,87.63 37.59,87.38 37.59,85.6 36.58,85.6 36.58,85.09 35.81,84.33 IC_L.42
N$3  (via drill 0.6)
  Top 0.203: IC_L.37 38.31,84.16 39.5,85.47 39.5,86.36 43.05,86.36 v42.8,86.61 | v59.05,88.14 R7.1
  Bottom 0.203: v42.8,86.61 45.47,86.61 45.47,85.6 46.99,85.6 47.12,88.14 v59.05,88.14
N$4  (via drill 0.6)
  Top 0.203: R3.1 20.32,89.15 21.08,88.39 v21.08,87.63 | v34.54,85.6 34.54,84.33 34.29,84.07 34.29,83.04 IC_L.45
  Bottom 0.203: v21.08,87.63 32.51,87.63 v34.54,85.6
N$5
  Top 0.203: C13.1 18.54,47.5 20.32,49.28 20.32,49.66 20.45,49.78 21.58,49.78 IC_R.48
N$6
  Top 0.406: U$1.1 94.01,17.28 C3.1 95.52,17.79 R8.2
N$7
  Top 0.203: IC_L.40 36.81,83.8 38.61,85.6 38.61,87.88 37.59,88.9 37.59,90.06 R5.1
N$8  (via drill 0.6)
  Top 0.203: IC_L.35 39.31,84.14 40.26,85.09 v40.64,85.09 | v77.6,85.85 77.6,88.92 R6.1
  Bottom 0.203: v40.64,85.09 43.81,85.09 43.94,84.96 45.97,84.96 46.35,85.22 76.96,85.22 v77.6,85.85
N$9
  Top 0.203: C15.1 12.21,48.91 13.08,49.78 13.08,51.31 13.84,52.07 18.92,52.07 19.3,52.45 21.5,52.45 IC_R.43
N$16
  Top 0.203: R1.2 30.73,73.53 31.75,74.55 31.75,75.41 IC_L.7
N$17
  Top 0.406: R7.2 59.05,92.58 Q5.1
N$18
  Top 0.406: R6.2 Q6.1
N$19
  Top 0.406: R5.2 38.61,92.19 39.37,92.58 48.9,92.58 48.9,93.22 51.44,93.22 Q4.1
N$20
  Top 0.406: R4.2 31.75,95.12 35.56,95.12 Q3.1
N$21
  Top 0.406: R3.2 20.32,93.22 24.13,93.22 Q2.1
N$22  (via drill 0.6)
  Top 0.203: v15.88,91.82 17.64,91.82 R2.2
  Top 0.406: Q1.1 v8.26,92.58 | 17.78,92.58 R2.2
  Bottom 0.203: v8.26,92.58 15.11,92.58 v15.88,91.82
N$23  (via drill 0.6)
  Top 0.203: IC_R.47 18.96,50.33 v18.92,49.78 | v13.34,15.11 11.79,15.11 R12.1
  Bottom 0.203: v18.92,49.78 18.41,49.53 17.14,48.26 15.62,48.26 13.46,46.1 13.46,15.24 v13.34,15.11
N$24  (via drill 0.6)
  Top 0.203: C5.1 46.34,67.55 v47.37,68.58 | v47.37,75.31 47.37,75.18 46.74,74.55 41.91,74.55 41.78,74.68 41.78,75.45 IC_L.27
  Bottom 0.203: v47.37,68.58 v47.37,75.31
N$27
  Top 0.203: C6.1 37.32,67.83 35.56,67.82 35.56,72.52 35.31,72.77 IC_L.14
N$28
  Top 0.203: IC_L.15 35.81,72.77 36.2,72.26 36.2,68.94 C6.2
N$29
  Top 0.203: C8.1 31.75,85.6 32.77,84.58 32.77,83.07 IC_L.48
N$30
  Top 0.203: IC_L.13 34.81,72.63 35.05,72.39 35.05,67.42 C7.1
N$31
  Top 0.203: IC_L.11 33.78,75.44 33.78,73.14 R9.1 31.48,71.61 31.24,71.37 31.24,68.58 31.5,68.33 31.61,68.33 R38.2
N$32
  Top 0.203: IC_R.42 19.05,52.83 18.67,52.45 13.59,52.45 12.45,51.31 12.45,49.91 10.16,49.91 10.03,49.78 10.03,41.77 R14.1
N$33  (via drill 0.6)
  Top 0.203: IC_R.37 18.12,55.33 16.89,54.1 15.49,54.1 15.11,54.48 15.11,56.39 14.61,56.9 12.32,56.9 v10.79,58.42 | v11.18,64.26 11.18,66.66 R17.1
  Bottom 0.203: v10.79,58.42 11.56,58.42 13.08,59.94 13.08,62.36 v11.18,64.26
N$34
  Top 0.203: IC_R.45 16.53,51.33 15.37,50.16 15.37,39.24 12.95,36.83 12.95,35.94 11.18,34.16 11.18,27.54 R13.1
N$35
  Top 0.203: R15.1 12.57,53.09 12.95,53.47 14.99,53.47 15.24,53.21 18.29,53.21 18.92,53.85 21.61,53.85 IC_R.40
N$36  (via drill 0.6)
  Top 0.203: R16.1 11.18,82.04 v12.95,80.26 | IC_R.35 19.36,56.33 17.4,58.29 15.11,58.29 v14.73,57.91
  Bottom 0.203: v12.95,80.26 12.95,64.14 16.13,60.96 17.4,60.96 19.3,62.87 20.83,62.87 22.23,61.47 22.23,60.96 19.18,57.91 v14.73,57.91
N$43
  Top 0.203: IC_R.7 34.48,48.83 37.85,45.47 38.72,45.47 R11.2
N$44
  Top 0.203: Q11.1 R17.2
N$45
  Top 0.203: Q12.1 R16.2
N$46
  Top 0.203: Q10.1 5.48,55.88 R15.2
N$47
  Top 0.203: R14.2 8.53,40.78 6.22,38.48 4.95,38.48 Q9.1
N$48
  Top 0.203: Q8.1 R13.2
N$49
  Top 0.203: R12.2 9.54,13.73 6.86,11.05 5.46,11.05 Q7.1
N$50
  Top 0.203: IC_R.27 32.68,58.83 C12.1
N$53
  Top 0.203: IC_R.14 30.1,52.33 30.73,52.96 35.05,52.96 35.56,52.45 35.56,51.56 35.69,51.44 37.32,51.44 C10.1
N$54
  Top 0.203: IC_R.15 29.97,52.83 30.48,53.34 35.7,53.34 C10.2
N$55
  Top 0.203: C25.1 14.11,54.98 15.37,53.72 17.14,53.72 18.29,54.86 21.59,54.86 IC_R.38
N$56
  Top 0.203: IC_R.13 30.24,51.83 30.99,52.58 34.8,52.58 35.18,52.2 35.18,51.44 35.56,51.05 37.59,51.05 38.1,51.56 39.64,51.56 C14.1
N$57
  Top 0.203: IC_R.11 30.38,50.83 31.37,51.82 33.53,51.82 35.05,50.29 40.64,50.29 40.24,49.64 R10.2 41.4,49.28 41.51,49.16 41.88,49.16 R18.1
N$58  (via drill 0.6)
  Top 0.203: C19.1 57.91,14.99 v57.02,14.1 | v38.99,15.24 38.86,15.24 38.35,15.75 38.35,16.63 IC_S.48
  Bottom 0.203: v57.02,14.1 51.44,14.1 51.05,14.48 43.81,14.48 43.31,14.99 39.24,14.99 v38.99,15.24
N$59  (via drill 0.6)
  Top 0.203: IC_S.47 37.81,14.77 38.23,14.35 39.62,14.35 40.01,13.97 41.15,13.97 41.78,13.34 v42.42,13.97 | v83.19,13.08 83.19,10.52 R21.1
  Bottom 0.203: v42.42,13.97 43.18,13.21 46.74,13.21 47.5,13.97 50.55,13.97 51.56,12.95 57.02,12.95 58.04,13.97 70.61,13.97 71.63,12.95 83.06,12.95 v83.19,13.08
N$60  (via drill 0.6)
  Top 0.203: IC_S.42 35.31,10.66 v35.81,10.16 | v53.59,10.03 55.39,10.03 R23.1
  Bottom 0.203: v35.81,10.16 36.96,10.16 37.97,11.18 52.45,11.18 v53.59,10.03
N$61
  Top 0.203: R26.1 31.24,7.75 32.38,7.75 32.38,10.16 32.77,12.19 32.77,14.47 IC_S.37
N$62  (via drill 0.6)
  Top 0.203: IC_S.45 36.81,14.5 37.47,13.84 37.47,13.21 38.23,12.45 v38.73,12.95 | v68.83,12.95 68.83,12.18 R22.1
  Bottom 0.203: v38.73,12.95 39.37,12.32 47.24,12.32 48.01,13.08 50.16,13.08 51.31,11.94 59.18,11.94 60.45,13.21 68.58,13.21 v68.83,12.95
N$63
  Top 0.203: IC_S.40 34.29,16.56 34.29,7.48 R24.1
N$64
  Top 0.203: R25.1 21.08,10.16 23.62,12.7 25.53,12.7 26.04,13.21 26.92,13.21 29.08,11.05 30.73,11.05 31.88,12.19 31.88,14.45 IC_S.35
N$67
  Top 0.203: HALL_L.2 R41.1
N$71
  Top 0.203: IC_S.7 39.31,28.64 39.5,28.83 40.26,28.83 41.53,27.56 47.23,27.56 R20.2
N$72
  Top 0.203: R26.2 29.48,5.73 Q17.1
N$73
  Top 0.203: Q18.1 14.1,6.35 16,8.25 16,9.13 R25.2
N$74
  Top 0.203: R24.2 34.42,3.17 35.81,1.78 42.55,1.78 42.93,2.16 Q16.1
N$75
  Top 0.203: R23.2 55.5,5.46 Q15.1
N$76
  Top 0.203: R22.2 69.47,7.37 Q14.1
N$77
  Top 0.203: R21.2 83.31,5.08 Q13.1
N$78
  Top 0.203: IC_S.27 29.31,24.92 28.57,25.65 28.57,26.4 C18.1
N$81
  Top 0.203: C16.1 37.34,31.75 35.69,30.1 35.69,25.27 35.81,25.15 IC_S.14
N$82
  Top 0.203: IC_S.15 35.31,30.36 36.07,31.11 36.07,32.5 C16.2
N$83  (via drill 0.6)
  Top 0.203: IC_S.43 35.81,13.97 v36.32,13.46 | v48.77,12.32 48.77,9.8 C26.1
  Bottom 0.203: v36.32,13.46 36.7,13.46 38.23,11.94 48.39,11.94 v48.77,12.32
N$84
  Top 0.203: IC_S.13 36.31,30.09 36.96,30.73 39.1,30.73 C20.1
N$86  (via drill 0.6)
  Top 0.203: C27.1 28.32,10.54 28.7,10.16 30.73,10.16 v31.5,9.4 | v33.15,9.52 33.15,10.8 33.27,13.34 33.27,14.48 IC_S.38
  Bottom 0.203: v31.5,9.4 31.5,9.65 v33.15,9.52
N$88
  Top 0.203: IC_L.43 35.31,84.33 35.81,84.84 35.81,85.99 C21.1
N$89
  Top 0.203: IC_L.38 37.81,84.29 38.99,85.47 38.97,87.76 C22.1
N$91
  Top 0.203: IC_S.11 37.31,29.44 37.59,29.72 40.64,29.72 41.78,28.57 43.94,28.57 43.94,31.75 44.31,32.89 | 44.31,32.89 R27.2 | 44.31,32.89 R28.2
N$96
  Top 0.203: HALL_L.4 R42.1
N$97
  Top 0.203: HALL_L.5 R43.1
N$98
  Top 0.203: HALL_R.2 R19.1
N$99
  Top 0.203: HALL_R.4 R39.1
N$100
  Top 0.203: HALL_R.5 R40.1
N$101
  Top 0.203: R44.1 HALL_S.2
N$102
  Top 0.203: HALL_S.4 R45.1
N$103
  Top 0.203: HALL_S.5 93.98,32.12 R46.1
N$106  (via drill 0.6)
  Top 0.203: IC_S.26 29.81,27.72 v27.56,29.97 | v71.63,30.73 72.53,30.73 R48.2
  Bottom 0.203: v27.56,29.97 27.05,29.97 24.77,27.69 24.77,23.62 28.57,19.81 66.17,19.81 72.52,26.16 72.52,29.84 v71.63,30.73
N$107  (via drill 0.6)
  Top 0.203: IC_S.25 30.31,27.86 28.45,29.72 28.45,31.11 v27.81,31.75 | v74.55,25.4 74.55,25.91 74.93,26.29 74.93,28.97 R49.2
  Bottom 0.203: v27.81,31.75 27.3,31.75 26.67,31.11 26.67,30.1 24.38,27.81 24.38,23.49 28.45,19.43 68.58,19.43 v74.55,25.4
N$110  (via drill 0.6)
  Top 0.203: IC_L.26 41.31,74.51 41.66,74.17 48.01,74.17 48.9,75.06 48.9,76.45 v49.66,77.22 | v60.07,74.8 60.2,74.8 60.83,75.44 69.58,75.44 R47.2
  Bottom 0.203: v49.66,77.22 50.16,77.22 50.8,77.85 56.13,77.85 57.91,76.07 58.8,76.07 v60.07,74.8
N$111  (via drill 0.6)
  Top 0.203: R50.2 74.28,75.82 58.93,75.82 58.29,75.18 v58.04,75.18 | IC_L.25 40.81,74.25 41.27,73.79 46.23,73.79 46.86,73.53 48.26,73.53 v49.91,75.18
  Bottom 0.203: v49.91,75.18 50.8,75.18 51.31,75.69 57.4,75.69 v58.04,75.18
N$112  (via drill 0.6)
  Top 0.203: IC_R.26 36.99,58.33 39.62,60.96 46.74,60.96 v47.12,60.58 | v58.42,54.99 59.44,56.02 R51.2
  Bottom 0.203: v47.12,60.58 49.53,60.58 50.93,59.18 55.37,59.18 55.63,58.93 55.63,55.37 56.01,54.99 v58.42,54.99
N$113  (via drill 0.6)
  Top 0.203: IC_R.25 37,57.83 39.75,60.58 45.59,60.58 46.48,59.69 48.64,59.69 v48.77,59.56 | v57.28,53.98 57.28,53.96 R52.2
  Bottom 0.203: v48.77,59.56 50.04,59.56 52.45,57.15 52.45,54.61 54.23,52.83 55.75,52.83 56.9,53.98 v57.28,53.98
OCTW_L
  Top 0.203: IC_L.5 30.81,74.75 30.61,74.55 28.45,74.55 27.56,73.79 R57.1 26.94,71.25 26.16,71.25 25.91,70.99 25.91,64.01 26.67,63.25 48.13,63.25 48.9,64.01 65.91,64.01 67.31,64.14 67.44,64.14 NANO_L.A3
OCTW_R  (via drill 0.6)
  Top 0.203: IC_R.5 33.58,47.83 37.72,43.69 37.72,43.32 R56.1 38.62,42.66 39.12,42.16 v46.23,42.16 | v59.82,44.45 60.2,44.45 60.45,44.7 67.06,44.7 NANO_R.A3
  Bottom 0.203: v46.23,42.16 48.51,44.45 v59.82,44.45
OCTW_S  (via drill 0.6)
  Top 0.203: IC_S.5 40.31,26.59 40.39,26.67 43.31,26.67 v43.94,26.04 | v50.16,24.77 66.17,24.77 NANO_S.A3 68.07,27.69 R58.1
  Bottom 0.203: v43.94,26.04 48.9,26.04 v50.16,24.77
PHASE_AL
  Top 0.203: IC_L.46 33.78,83.05 33.78,86.61 32.53,87.87 C8.2 31.73,87.88 27.18,87.88 25.65,88.9 25.65,91.95 26.67,92.46 Q2.2
  pour Top (rank 2, no thermals): 12.06,100.2 27.94,100.2 27.94,93.22 12.06,93.22
PHASE_AR  (via drill 0.6)
  Top 0.203: IC_R.46 18.19,50.83 v17.02,49.66 | v14.35,49.78 14.35,47.51 | 14.35,47.51 C13.2 | 14.35,47.51 14.35,38.73 12.45,36.83 12.45,36.07 10.67,34.29 10.67,30.73 9.53,29.59 5.21,29.59 Q8.2
  Bottom 0.203: v17.02,49.66 14.48,49.66 v14.35,49.78
  pour Top (rank 2, no thermals): 1.02,31.75 7.37,31.75 7.62,14.61 0.89,14.61
PHASE_AS  (via drill 0.6)
  Top 0.203: IC_S.46 37.31,14.63 38.1,13.84 39.37,13.84 40.26,12.95 v40.51,13.21 | v58.8,13.21 61.85,13.21 | 61.85,13.21 62.48,12.57 62.48,12.19 64.01,10.67 64.01,7.49 64.52,6.99 | C19.2 60.56,14.49 61.85,13.21
  Bottom 0.203: v40.51,13.21 40.64,13.21 41.15,12.7 46.86,12.7 47.75,13.59 50.42,13.59 51.56,12.45 58.04,12.45 v58.8,13.21
  pour Top (no thermals): 63.63,7.87 79.76,7.87 79.76,1.4 63.25,1.4 63.25,7.87
PHASE_BL
  Top 0.203: IC_L.41 36.32,83.03 36.32,84.33 36.58,84.58 37.08,84.58 38.1,85.6 38.1,87.63 37.1,88.63 C21.2 36.21,88.39 35.31,88.39 34.54,89.15 34.54,92.2 35.81,93.47 39.12,93.47 40.64,95 Q3.3
  pour Top (no thermals): 39.37,100.2 55.24,100.2 55.24,93.22 39.37,93.22
PHASE_BR
  Top 0.203: PHASE_BR.P$1 10.81,50.42 C15.2 11.54,50.91 13.46,52.83 18.41,52.83 19.05,53.47 20.57,53.47 20.7,53.34 21.61,53.34 IC_R.41
  pour Top (no thermals): 0.64,59.69 7.24,59.69 7.24,42.67 0.64,42.67
PHASE_BS  (1 unrouted)
  Top 0.203: IC_S.41 34.81,8.62 35.05,8.38 35.43,8.38 35.81,8 35.81,2.54 36.2,2.16 40.01,2.16 40.51,2.67 40.51,4.95 Q16.2
  pour Top (no thermals): 39.12,6.99 44.83,8.25 52.07,8.13 52.07,1.27 39.12,1.27
PHASE_CL  (via drill 0.6)
  Top 0.203: C22.2 39.89,89.65 41.15,88.39 41.15,87.12 41.4,86.87 41.66,86.87 42.16,87.38 43.43,87.38 | 43.43,87.38 43.69,87.12 43.81,86.23 43.43,85.85 40.01,85.85 39.88,85.72 39.88,85.34 38.86,84.2 38.86,83.07 IC_L.36 | Q5.3 67.31,93.85 66.17,92.71 60.96,92.71 60.45,92.2 60.45,88.14 v60.83,87.76 | v47.88,87.38 47.37,87.76 47.37,88.65 46.74,89.28 45.34,89.28 43.43,87.38
  Bottom 0.203: v60.83,87.76 60.83,87.38 60.07,86.61 56.52,86.61 56.13,86.99 50.29,86.99 v47.88,87.38
  pour Top (no thermals): 66.04,100.2 81.28,100.2 81.28,92.58 66.04,92.58
PHASE_CR  (via drill 0.6)
  Top 0.203: IC_R.36 16.51,55.83 | 16.51,55.83 16.44,55.83 C25.2 | Q11.3 8.89,71.88 v13.97,66.8 | v17.27,56.9 17.27,56.59 16.51,55.83
  Bottom 0.203: v13.97,66.8 13.97,63.75 16.26,61.47 17.14,61.47 19.3,63.63 20.7,63.63 23.11,61.21 22.99,61.21 18.54,56.77 17.4,56.77 v17.27,56.9
  pour Top (rank 2, no thermals): 0.64,70.87 7.11,70.87 7.11,85.85 0.64,85.85 0.64,70.99
PHASE_CS
  Top 0.203: IC_S.36 32.31,11.99 30.99,10.67 28.83,10.67 26.67,12.83 26.3,12.83 C27.2 23.77,8.65 23.62,8.51
  pour Top (no thermals): 10.41,9.02 25.15,9.02 25.15,1.52 10.41,1.52
SN1L  (via drill 0.6)
  Top 0.203: R29.2 27.18,90.68 v26.42,90.42 | IC_L.33 40.39,83.1 40.39,83.95 40.64,84.2 41.27,84.2 41.53,84.45 41.53,84.96 41.91,85.34 44.2,85.34 v44.7,85.85
  Bottom 0.203: v26.42,90.42 26.92,89.15 27.94,88.14 32.51,88.14 34.29,86.36 35.31,86.36 36.07,85.6 41.4,85.6 41.66,85.85 v44.7,85.85
  pour Top (no thermals): 28.57,99.57 30.48,99.57 30.48,88.77 27.3,88.77 27.3,93.22 27.94,93.22 27.94,99.57
SN1R
  Top 0.203: IC_R.33 19.13,57.33 17.65,58.8 11.94,58.8 R31.2
  pour Top (rank 2, no thermals): 0.76,62.36 11.81,62.36 11.81,59.56 0.76,59.56 0.76,62.23
SN1S  (via drill 0.6)
  Top 0.203: R33.2 9.01,11.42 v10.29,12.7 | IC_S.33 30.81,11.76 30.48,11.43 29.21,11.43 28.7,11.94 28.7,13.21 28.32,13.59 24.77,13.59 v24.64,13.46
  Bottom 0.203: v10.29,12.7 23.88,12.7 v24.64,13.46
  pour Top (rank 2, no thermals): 8.51,11.43 10.29,11.43 10.29,1.02 7.87,1.02 7.87,10.92 8.38,11.18
SN2L  (via drill 0.6)
  Top 0.203: IC_L.31 41.31,83.73 41.91,84.33 42.42,84.96 45.47,84.96 v46.23,86.36 | v53.72,89.92 55.38,89.92 R30.2
  Bottom 0.203: v46.23,86.36 46.35,87.5 46.74,88.52 52.32,88.52 v53.72,89.92
  pour Top (rank 2, no thermals): 55.88,99.57 57.78,99.57 57.78,88.77 54.61,88.77 54.61,93.22 55.24,93.22 55.24,99.57
SN2R  (via drill 0.6)
  Top 0.203: IC_R.31 19.4,58.33 v18.16,59.56 | v12.06,37.85 12.06,36.58 R32.2
  Bottom 0.203: v18.16,59.56 14.1,59.56 12.95,58.42 12.95,38.73 v12.06,37.85
  pour Top (no thermals): 0.51,35.05 9.78,35.05 9.91,31.37 0.76,31.37 0.64,34.93 0.51,34.93
SN2S  (via drill 0.6)
  Top 0.203: IC_S.31 29.72,14.42 29.72,12.57 v29.59,12.45 | v61.09,12.32 61.09,9.52 R34.2
  Bottom 0.203: v29.59,12.45 37.08,12.45 37.97,11.56 60.33,11.56 v61.09,12.32
  pour Top (rank 2, no thermals): 63.25,1.65 63.12,10.8 60.33,10.8 60.33,1.4 62.99,1.4
SO1L
  Top 0.203: C41.1 R50.1 NANO_L.A0
SO1R  (via drill 0.6)
  Top 0.203: R52.1 65.04,53.98 C43.1 65.17,51.29 v65.66,50.8 | v70.1,50.67 71.75,50.67 NANO_R.A0
  Bottom 0.203: v65.66,50.8 69.98,50.8 v70.1,50.67
SO1S
  Top 0.203: R49.1 76.6,31.99 | 76.6,31.99 77.72,30.86 77.72,28.7 NANO_S.A0 | 76.6,31.99 76.6,36.58 C39.1
SO2L
  Top 0.203: NANO_L.A1 71.12,67.82 R47.1 C40.1
SO2R
  Top 0.203: R51.1 C42.1 65.15,56.01 66.17,54.99 66.17,52.2 70.61,47.75 72.14,47.75 NANO_R.A1
SO2S
  Top 0.203: NANO_S.A1 73.66,28.96 74.17,29.46 74.42,29.46 74.93,29.97 74.93,31.88 74.06,32.75 R48.1 73.66,34.93 72.9,35.69 72.9,36.85 C38.1
T_L  (via drill 0.6)
  Top 0.203: T_L.3 v91.69,77.98 | v87.76,78.1 78.61,78.1 NANO_L.D2
  Bottom 0.203: v91.69,77.98 87.88,77.98 v87.76,78.1
T_R
  Top 0.203: NANO_R.D2 76.2,60.2 84.71,51.69 88.52,51.69 92.96,56.13 97.54,56.13 T_R.3
T_S  (via drill 0.6)
  Top 0.203: T_S.3 96.14,38.61 92.84,41.91 88.77,41.91 88.52,41.66 v88.52,40.13 | v75.69,39.5 75.69,41.91 NANO_S.D2
  Bottom 0.203: v88.52,40.13 86.61,40.01 76.2,40.01 v75.69,39.5
VCC  (via drill 0.6)
  Top 0.203: R35.2 29.34,68.2 v28.19,67.06 | v39.88,68.07 40.26,68.07 40.51,67.82 | IC_L.10 33.31,76.36 | 33.31,76.36 33.4,76.45 40.13,76.45 40.26,76.33 40.26,76.2 | 40.26,76.2 40.26,74.04 | 40.26,74.04 41.27,73.02 45.21,73.02 v45.34,72.9 44.96,72.52 41.66,72.52 40.26,73.91 40.26,74.04 | v45.59,66.17 46.23,66.17 46.74,66.67 | 33.31,76.36 40.1,76.36 40.26,76.2 | v45.47,66.17 48.13,66.17 50.42,68.45 69.09,68.45 v69.72,69.09 | v78.11,67.18 78.11,67.56 78.61,68.07 | IC_R.24 28.25,57.33 28.07,57.15 28.07,50.42 28.19,50.29 32,50.29 v32.38,50.67 | v42.67,45.85 44.45,43.18 45.09,43.82 | IC_S.10 37.81,23.2 37.72,23.11 30.99,23.11 30.73,23.37 30.73,28.45 29.08,30.1 29.08,38.86 31.5,41.28 37.08,41.28 37.47,40.89 29.08,40.89 26.67,38.48 26.67,32.38 26.04,31.75 26.04,24.13 v26.8,23.37 | v45.85,22.48 46.74,22.48 47.12,22.1 | S_POT.2 101.6,42.29 99.69,40.39 95.25,40.39 92.46,43.18 89.92,43.18 v89.79,43.05 | v84.2,37.47 84.2,35.94 84.58,35.56
  Bottom 0.203: v28.19,67.06 38.86,67.06 v39.88,68.07 | v45.59,66.17 45.34,66.42 v45.34,72.9 45.34,66.29 v45.47,66.17 | v69.72,69.09 76.2,69.09 v78.11,67.18 | v32.38,50.67 36.2,50.67 v42.67,45.85 | v26.8,23.37 26.8,22.73 29.21,20.32 43.69,20.32 v45.85,22.48 | v89.79,43.05 91.31,41.53 91.31,41.15 89.03,38.1 84.84,38.1 v84.2,37.47
  pour Top (rank 4, no thermals): 106.68,82.8 24.77,83.06 24.77,17.65 106.68,17.4
VDD  (via drill 0.6)  (1 unrouted)
  Top 0.203: IC_L.29 42.31,84.09 42.8,84.58 46.74,84.58 46.99,85.72 46.99,87.38 v45.34,87.63 | IC_R.29 21.44,59.33 v20.19,60.58 | IC_S.29 26.58,14.51 v26.54,14.48
  Top 0.406: C23.1 v82.55,86.87
  Bottom 0.203: v45.34,87.63 45.72,88.14 45.59,88.27 | v20.19,60.58 16,60.58 15.75,60.58 15.24,60.07 | v26.54,14.48 26.54,12.45 27.05,11.94 28.07,11.94 28.57,11.43
  Bottom 0.406: v82.55,86.87 81.28,86.87
  pour Bottom (no thermals): 0,100.84 107.06,100.71 107.06,85.47 12.7,85.6 12.7,12.57 105.41,12.57 105.41,0.51 0,0.51
VEE  (via drill 0.6)
  Top 0.406: C4.1 92.96,20.83 91.82,19.68 83.99,19.68 | 83.99,19.68 U$1.3 | 83.99,19.68 83.99,24.8 NANO_S.VIN 86.36,37.08 84.58,38.86 84.58,40.01 85.47,40.89 87.38,40.89 87.88,41.4 87.88,44.7 NANO_R.VIN 86.87,46.74 v86.87,49.28 | NANO_L.VIN 86.36,66.17 v87.38,67.18 | v88.65,62.36 88.65,54.86 v86.49,52.71
  Bottom 0.406: v87.38,67.18 87.38,66.67 88.14,65.91 88.14,62.87 v88.65,62.36 | v86.49,52.71 86.49,49.66 v86.87,49.28